# Altium PCB LV8548MC-TEST-V1.0.PcbDoc
Units mm, origin at the board's own origin, x right, y up, seen from the top; angles counter-clockwise.
Board outline 152.4 x 101.6 mm, 2 copper layers (Top Layer, Bottom Layer); 9 components, 14 nets, 34 pads, 4 vias.
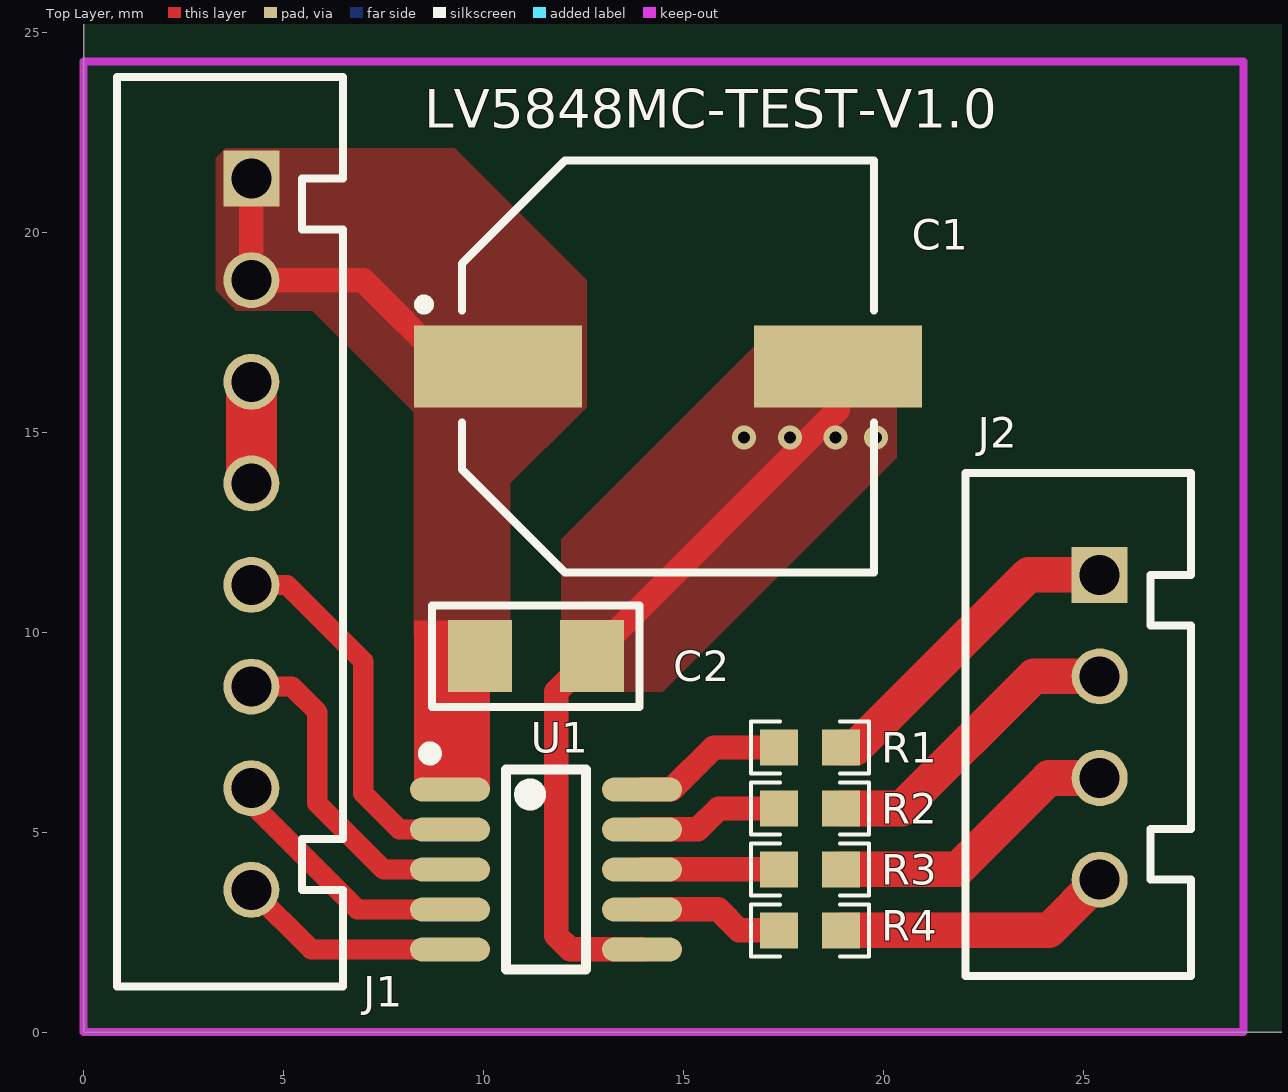
[diagram p0: Top Layer view]
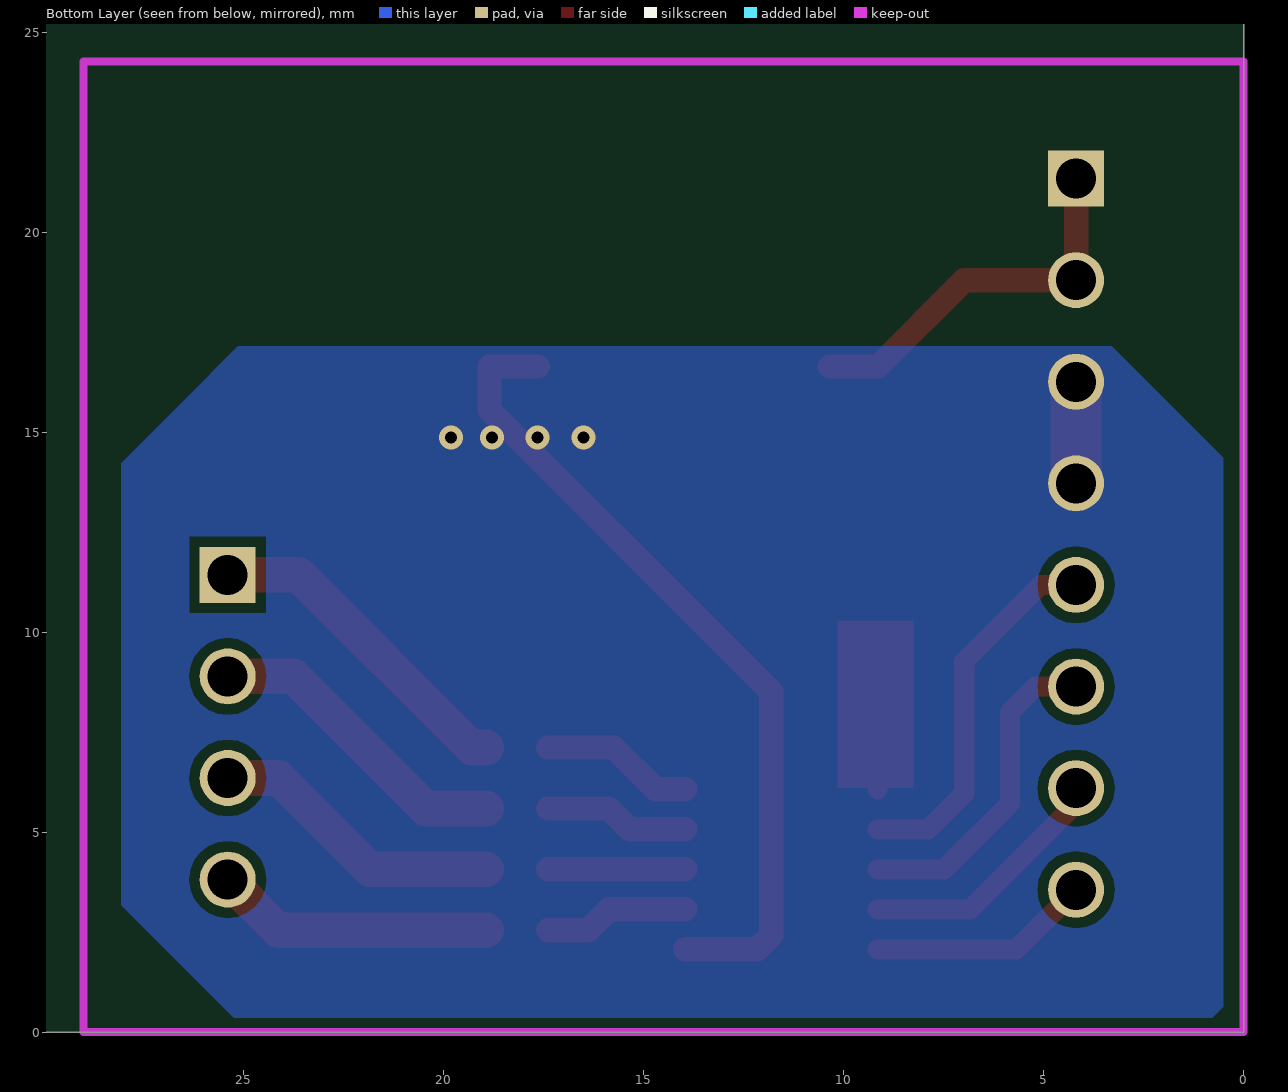
[diagram p1: Bottom Layer view, seen from below]

## Layer stack, top to bottom
Top Layer: signal copper 0.0356
Dielectric: dielectric 0.32, FR-4, Dk 4.8
Bottom Layer: signal copper 0.0356

## Board outline
0,0 152.4,0 152.4,101.6 0,101.6

## Design rules (kind name [scope] priority, off if disabled: settings)
Clearance [All] p1: gap=0.254
ComponentClearance [All] p1: gap=0 collisioncheckmode=3 verticalgap=0 showdistances=FALSE
FabricationTestPointUsage TestPointUsage [All] p1: valid=0 allowmultiple=FALSE
FabricationTestpoint Testpoint [All] p1: side=3 testpointundercomponent=TRUE minsize=1.016 maxsize=2.54 preferedsize=1.524 minholesize=0 maxholesize=1.016 preferedholesize=0.813 testpointgrid=0.025 allowsidetop=TRUE allowsidebottom=TRUE usegrid=TRUE gridtolerance=0
Height [All] p1: minheight=0 maxheight=12.7 prefheight=0
HoleToHoleClearance [All] p1: gap=0 allowstackedmicrovias=TRUE
MinimumSolderMaskSliver [All] p1: minsoldermaskwidth=0
PlaneConnect [All] p1: planeconnectstyle=Direct reliefexpansion=0.508 reliefentries=4 reliefconductorwidth=0.254 reliefairgap=0.254
PolygonConnect [All] p1: connectstyle=Direct reliefconductorwidth=0.254 reliefentries=4 polygonreliefangle="90 Angle"
RoutingVias [All] p1: holewidth=0.3 width=0.6 viastyle="Through Hole" minholewidth=0.3 minwidth=0.6 maxholewidth=3 maxwidth=6
SilkToSilkClearance [All] p1: silktosilkclearance=0
SilkscreenOverComponentPads [All] p1: minsilkscreentomaskgap=0
SolderMaskExpansion [All] p1: expansion=0.102
Width [All] p1: maxlimit=12.7 minlimit=0.254 preferedwidth=0.254
19 further rules are at their usual default settings.

## Components (designator, comment, footprint, x,y, rotation, side; value= is the part's Value field where it differs from the comment)
C1 "470uF/35V" CAP_SO_10*10 10.668,16.764 r90 top
C2 "C1206" 1206 11.303,9.398 r0 top
J1 "PH2.0-8P" XH2.54-8 4.191,12.446 r270 top
J2 "XH2.54-4P" XH2.54-4 25.4,7.62 r270 top
R1 "R0603" 0603 18.161,7.112 r180 top
R2 "R0603" 0603 18.161,5.588 r180 top
R3 "R0603" 0603 18.161,4.064 r180 top
R4 "R0603" 0603 18.161,2.54 r180 top
U1 "LV8548MC" SOIC10 11.557,4.064 r270 top

## Footprints (in the part's own frame and the unit in brackets; to place one, negate y for a bottom-side part, rotate by r counter-clockwise, add the part's x,y. Pads: shape width x height; smd on the part's side, far side on the other; paste and mask are expansions set on the pad)
0603 [mm]
  rect 0.95x0.9 smd: 1(-0.775,0) 2(0.775,0)
  silkscreen extent -1.48,-0.65 1.48,0.65
1206 [mm] "3216"
  rect 1.6x1.8 smd: 1(-1.4,0) 2(1.4,0)
  silkscreen extent -2.59,-1.27 2.59,1.27
CAP_SO_10*10 [mm]
  rect 2.05x4.2 smd: 1(-0.127,0.313) 2(-0.127,-8.187)
  silkscreen extent -5.28,-9.09 5.02,2.29
SOIC10 [mm]
  oval 0.6x2 smd: 1(-2,-2.4) 2(-1,-2.4) 3(0,-2.4) 4(1,-2.4) 5(2,-2.4) 6(2,2.4) 7(1,2.4) 8(0,2.4) 9(-1,2.4) 10(-2,2.4)
  silkscreen extent -3.05,-3.05 2.5,1
XH2.54-4 [mm]
  rect 1.4x1.4 hole 1: 1(-3.81,0)
  round 1.4 hole 1: 2(-1.27,0) 3(1.27,0) 4(3.81,0)
  silkscreen extent -6.35,-3.35 6.22,2.29
XH2.54-8 [mm]
  rect 1.4x1.4 hole 1: 1(-8.89,0)
  round 1.4 hole 1: 2(-6.35,0) 3(-3.81,0) 4(-1.27,0) 5(1.27,0) 6(3.81,0) 7(6.35,0) 8(8.89,0)
  silkscreen extent -11.43,-3.35 11.3,2.29

## Part data
C1: library part "Cap Pol3", "Polarized Capacitor (Surface Moun"
C2: library part Cap, "Capacitor"
J1: "Header, 6-P"
J2: library part "Header 4", "Header, 4-P"
R1 R2 R3 R4: library part Res1, "Resist"
U1: library part LV8548

## Via types
v1: diameter 0.6, hole 0.3, Top Layer to Bottom Layer, 4 vias

## Nets (pads, with @x,y where several pads share a name; then routed paths per layer and width w, separated by ;. In a path a pad name is that pad's centre, name@x,y a point inside that pad or via, vN(x,y) a via of type N, cw(c..) or ccw(c..) an arc to the next point about the centre after c; other vN are vias at no path point)
A: J2.1 R1.1 | length 8.3
  Top Layer w0.889: R1.1 19.304,7.112 23.622,11.43 J2.1
A-: J2.2 R2.1 | length 7.8
  Top Layer w0.889: R2.1 20.447,5.588 23.749,8.89 J2.2
B: J2.3 R3.1 | length 7.4
  Top Layer w0.889: R3.1 21.844,4.064 24.13,6.35 J2.3
B-: J2.4 R4.1 | length 7
  Top Layer w0.889: R4.1 24.13,2.54 J2.4
GND: C1.2 C2.2 J1.3 J1.4 U1.6 | length 23.2
  Top Layer w0.61: U1.6 12.16,2.064 11.811,2.413 11.811,8.506 C2.2 18.855,15.55 C1.2 C1.2@17.653,16.637
  Top Layer w1.27: J1.4 J1.3
  other v1: 16.51,14.859 17.653,14.859 18.796,14.859 19.812,14.859
NetJ1_5: J1.5 U1.2 | length 9.4
  Top Layer w0.508: J1.5 5.08,11.176 6.985,9.271 6.985,5.969 7.89,5.064 U1.2
NetJ1_6: J1.6 U1.3 | length 8.2
  Top Layer w0.508: J1.6 5.207,8.636 5.842,8.001 5.842,5.715 7.493,4.064 U1.3
NetJ1_7: J1.7 U1.4 | length 7.2
  Top Layer w0.508: J1.7@4.191,5.969 J1.7 4.191,5.715 6.842,3.064 7.747,3.064 ; 7.096,3.064 7.747,3.064 ; U1.4 7.747,3.064
NetJ1_8: J1.8 U1.5 | length 5.6
  Top Layer w0.508: J1.8 5.683,2.064 U1.5
NetR1_2: R1.2 U1.10 | length 3.9
  Top Layer w0.61: U1.10 14.7,6.064 15.748,7.112 R1.2
NetR2_2: R2.2 U1.9 | length 3.6
  Top Layer w0.61: U1.9 15.351,5.064 15.875,5.588 R2.2
NetR3_2: R3.2 U1.8 | length 3.4
  Top Layer w0.61: U1.8 R3.2
NetR4_2: R4.2 U1.7 | length 3.6
  Top Layer w0.61: U1.7 15.859,3.064 16.383,2.54 R4.2
VIN: C1.1 C2.1 J1.1 J1.2 U1.1 | length 13.2
  Top Layer w0.508: U1.1 9.157,8.652 C2.1
  Top Layer w0.61: J1.1 J1.2 6.985,18.796 9.144,16.637 C1.1

## Polygon pours and split planes (outlines as drawn)
VIN on Top Layer "Top Layer-No Net" (solid, remove dead copper, pour order 6): 4.318,22.098 9.271,22.098 11.811,19.558 12.573,18.796 12.573,16.764 12.573,15.621 12.446,15.494 8.255,15.494 7.874,15.875 5.715,18.034 4.318,18.034 3.81,18.034 3.302,18.542 3.302,21.844 3.429,21.971 3.556,22.098 4.318,22.098
VIN on Top Layer "Top Layer-No Net" (solid, remove dead copper, pour order 4): 8.255,15.875 8.255,9.906 8.382,9.779 9.906,9.779 10.033,9.652 10.668,10.287 10.668,13.716 12.573,15.621
GND on Top Layer "Top Layer-No Net" (solid, remove dead copper, pour order 2): 11.938,9.906 11.938,12.319 14.478,14.859 16.891,17.272 20.32,17.272 20.32,14.351 14.732,8.763 14.478,8.509 12.827,8.509
GND on Bottom Layer "Top Layer-No Net" (solid, remove dead copper, pour order 8): 0.889,0.254 25.146,0.254 27.432,2.54 28.067,3.175 28.067,10.033 28.067,14.224 26.543,15.748 25.146,17.145 4.064,17.145 3.302,17.145 2.159,16.002 0.508,14.351 0.508,0.889 0.508,0.635 0.889,0.254

## Keep-outs
Keep-Out Layer:
  lines w0.2: 0,0 0,2.667 0,24.257 29,24.257 29,0 0,0

## Other copper
Top Layer:
  rectangle net VIN: 8.255,6.096 10.16,10.287

## Silkscreen, mask and mechanical layers (free items; w line width, h text height)
Top Overlay:
  text "LV5848MC-TEST-V1.0" at 8.509,22.606 h0.97